# Altium PCB Inc_filter_v1.PcbDoc (part 3 of 4)
Units mil, origin at the board's own origin, x right, y up, seen from the top; angles counter-clockwise.
Board outline 13370 x 13370 mil, 2 copper layers (Top Layer, Bottom Layer); 602 components, 261 nets, 1625 pads, 355 vias.
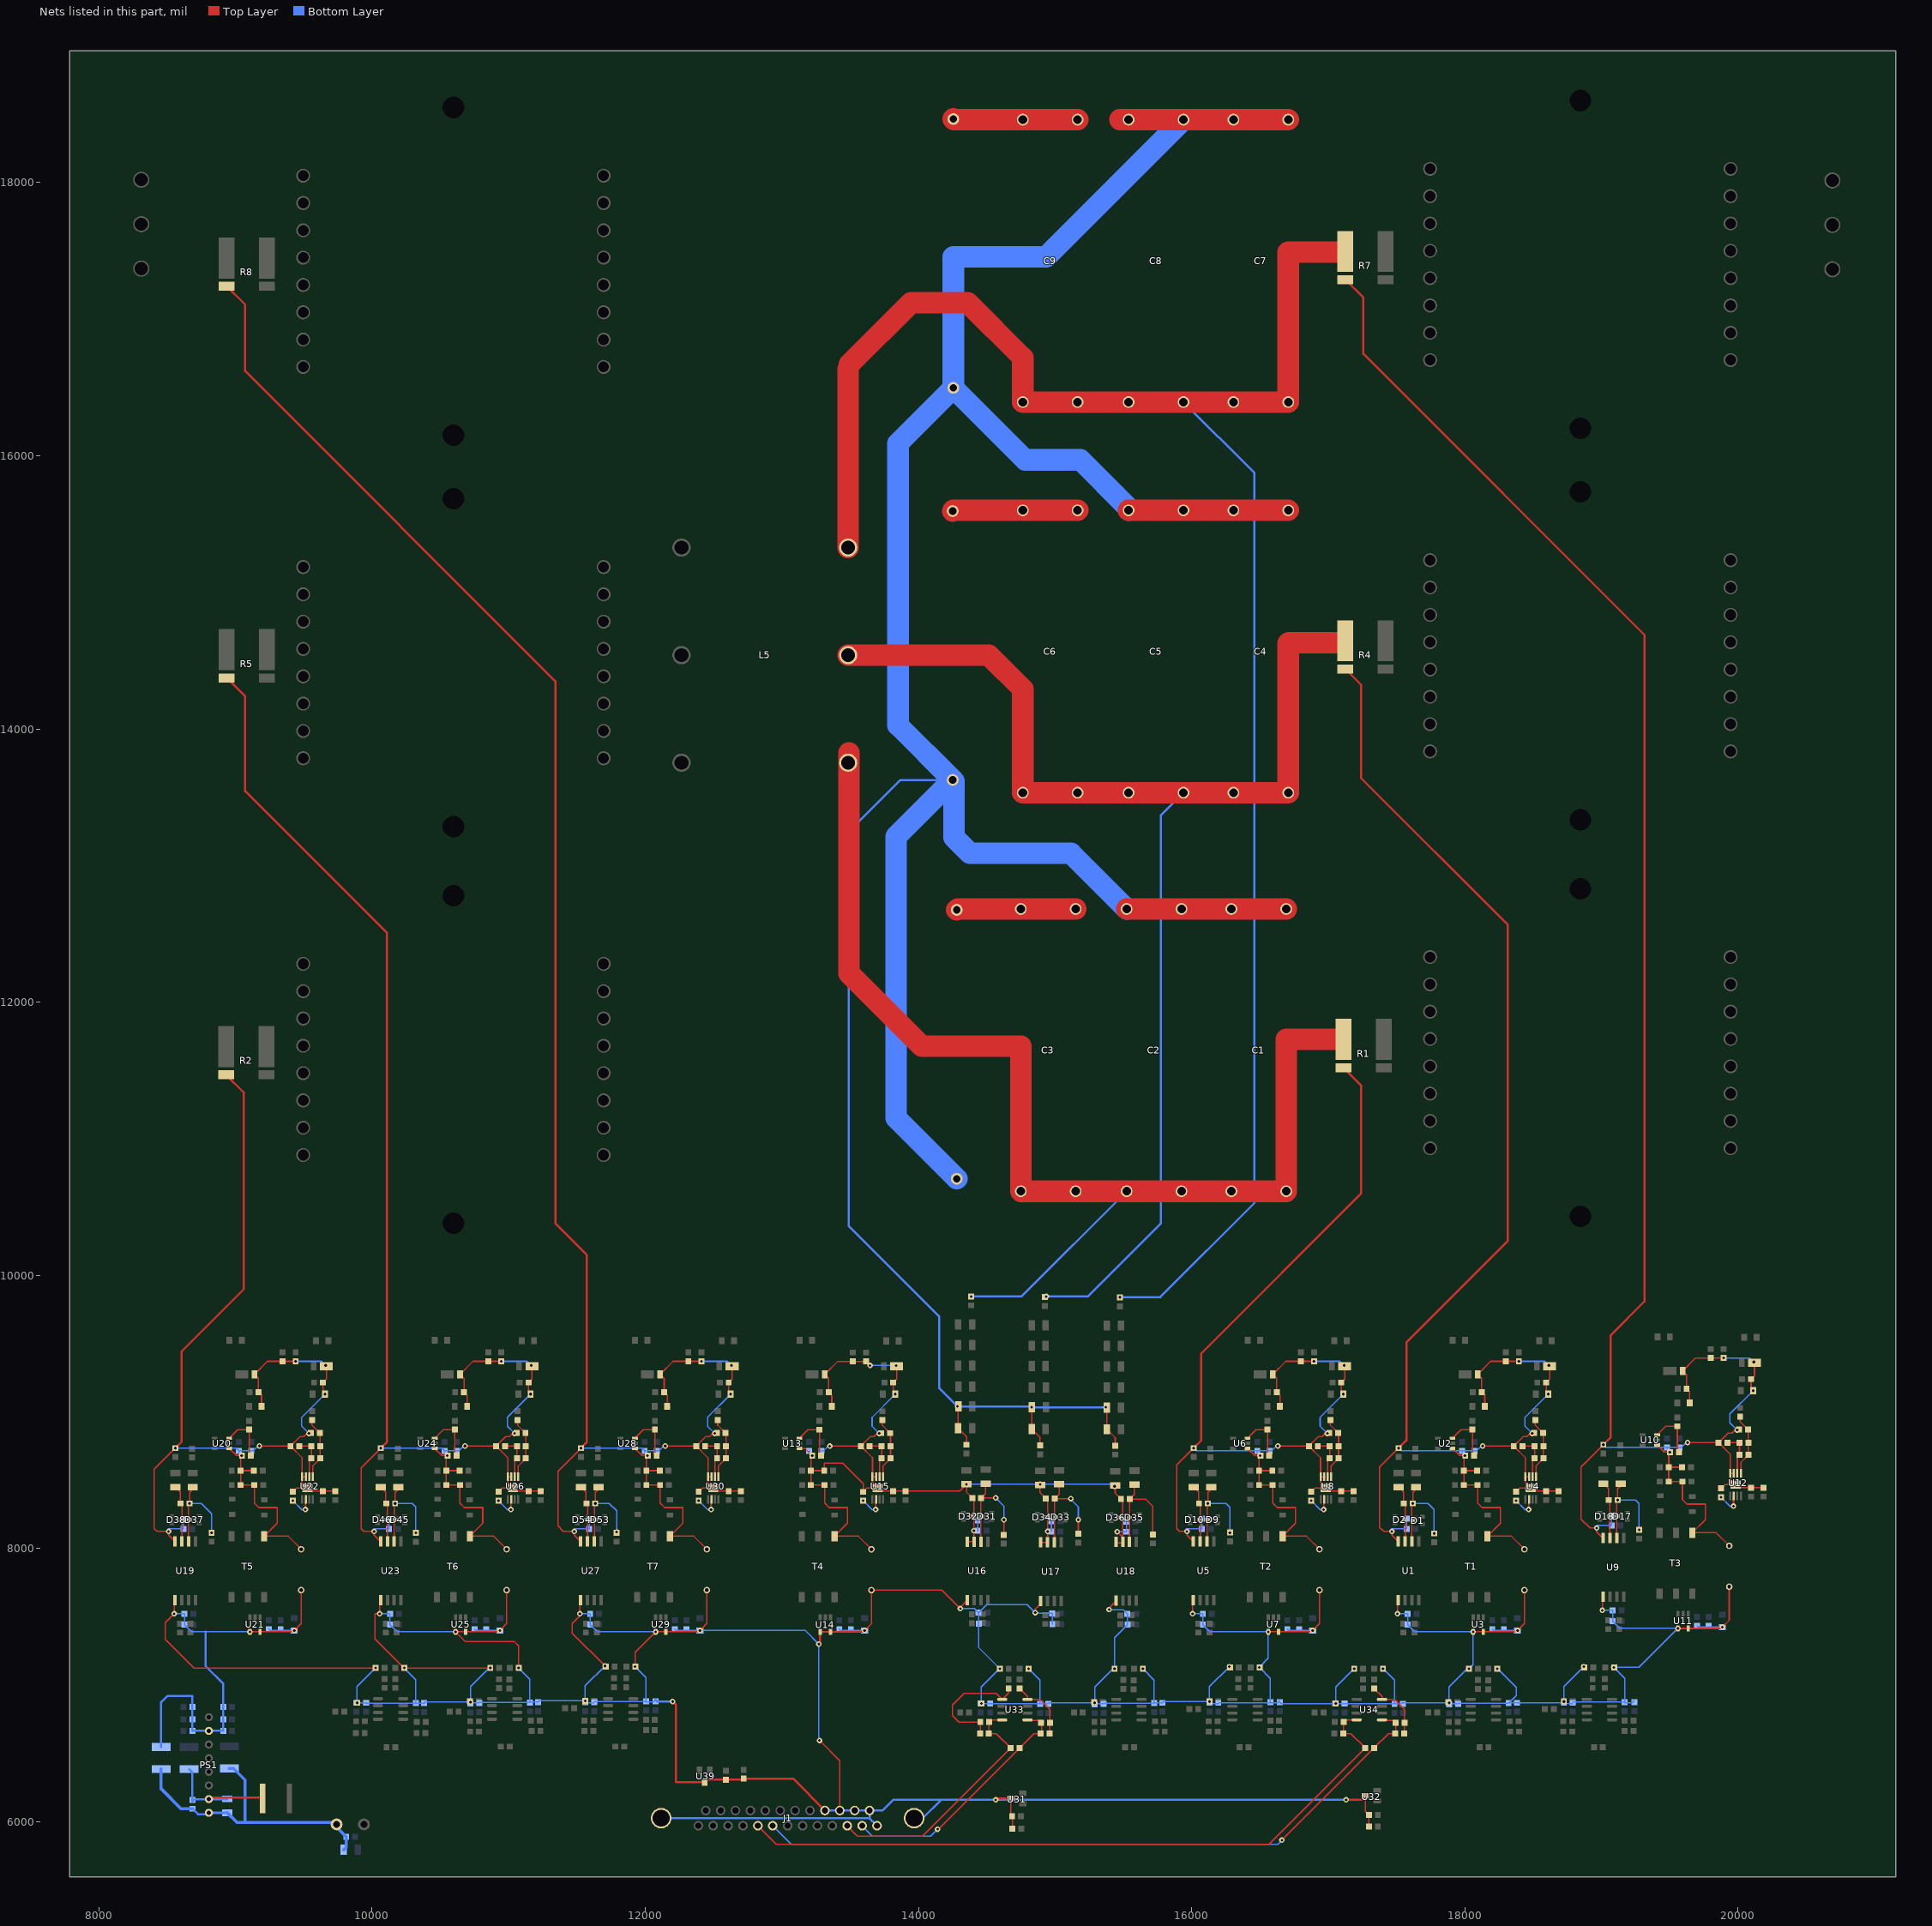
[diagram p3: the nets of this part, all layers, seen from the top]

## Via types
v1: diameter 40, hole 20, Top Layer to Bottom Layer, 355 vias

## Nets (pads, with @x,y where several pads share a name; then routed paths per layer and width w, separated by ;. In a path a pad name is that pad's centre, name@x,y a point inside that pad or via, vN(x,y) a via of type N, cw(c..) or ccw(c..) an arc to the next point about the centre after c; other vN are vias at no path point) (continued)
GND_LV: C11.2 C13.2 C15.1 C16.1 C17.1 C18.1 C36.2 C38.2 C40.1 C41.1 C42.1 C43.1 C61.2 C63.2 C65.1 C66.1 C67.1 C68.1 C85.1 C86.1 C87.1 C88.1 C106.2 C108.2 C111.2 C113.2 C116.2 C118.2 C121.2 C123.2 C125.1 C126.1 C127.1 C128.1 C146.2 C148.2 C150.1 C151.1 C152.1 C153.1 C171.2 C173.2 C175.1 C176.1 C177.1 C178.1 C197.2 C200.1 C201.1 C202.1 C203.2 C204.2 C205.2 C206.1 C207.1 C208.1 C209.1 C212.1 C213.1 C214.1 C215.1 C216.1 C217.1 C218.2 C219.2 C220.2 C221.2 C226.1 C227.1 C228.1 C229.1 C230.1 C231.1 C232.2 C233.2 C234.2 C235.2 C240.1 C241.1 C242.1 C243.1 C244.1 C245.1 C246.2 C247.2 C248.2 C249.2 C252.1 C253.1 C255.1 C256.1 C257.1 C258.2 C259.2 C262.1 C263.1 C264.1 C265.2 C266.2 C269.1 C270.1 C271.1 C272.2 C273.2 J1.13 J1.14 J1.15 J1.16 J1.17 J1.26 J1.27 PS1.7 R110.2 R111.2 R116.2 R118.2 R126.2 R127.2 R132.2 R134.2 R142.2 R143.2 R148.2 R150.2 R155.2 R158.2 R163.2 R166.2 R171.2 R174.2 U1.5 U3.4 U3.5 U5.5 U7.4 U7.5 U9.5 U11.4 U11.5 U14.4 U14.5 U16.5 U17.5 U18.5 U19.5 U21.4 U21.5 U23.5 U25.4 U25.5 U27.5 U29.4 U29.5 U31.3 U32.3 U39.3 | length 44028.6
  Top Layer w7.87: U19.5@8556.72,7621.96 8550.72,7615.96 v1(8550.72,7521.96) 8485,7456.24 8485,7335 8694.96,7125.04 v1(10025.04,7125.04) R158.2@10025.08,7125 ; U23.5@10061.72,7621.96 10055.72,7615.96 v1(10055.72,7521.96) 10021.96,7521.96 10021.96,7338.08 v1(10235.04,7125) v1(10865.08,7125) ; U27.5@11527,7621.96 11521,7615.96 v1(11521,7521.96) 11521,7506 11465,7450 11465,7380.04 v1(11705.04,7140) R174.2@11720.04,7140 ; v1(11925.04,7135) 11925.04,7239.57 v1(12075.47,7390) ; C85.1@13655,7694.72 14171.46,7694.72 v1(14306.18,7560) ; v1(14595,7120.04) v1(14595,7120.04) ; v1(16006,7521.96) 16006,7615.96 U5.5@16012,7621.96 ; v1(16275,7135) R148.2@16290,7135 ; v1(17190,7120.04) v1(17190,7120.04) ; v1(17506,7521.96) 17506,7615.96 U1.5@17512,7621.96 ; v1(18870,7135) R150.2@18885,7135 ; v1(19005.72,7546.96) 19005.72,7640.96 U9.5@19011.72,7646.96
  Top Layer w10: v1(9105.2,7390) U21.5@9180,7390 9420,7390 v1(9430,7400) 9480,7450 C125.1@9480,7695 9480,7700 C125.1@9475,7705 ; C150.1@10985,7695 10985,7450 v1(10935,7400) 10925,7390 U25.5@10685,7390 v1(10610.2,7390) 10680,7320.2 11039.8,7320.2 11072.52,7287.48 v1(11072.52,7125) ; v1(12075.47,7390) U29.5@12150.28,7390 12390.28,7390 v1(12400.28,7400) 12450.28,7450 C175.1@12450.28,7695 ; v1(13275,6595) 13423.58,6446.42 J1.16@13423.58,6081.81 ; U14.4@13280.2,7389.72 U14.5@13355,7389.72 13595,7389.72 v1(13605,7399.72) 13655,7449.72 C85.1@13655,7694.72 ; v1(14306.18,7560) 14306.18,7570.87 U16.5@14356.18,7620.87 ; U31.3@14676.69,6170 14676.69,6048.35 C206.1@14685.04,6040 14687.52,6037.52 C207.1@14687.52,5950 ; v1(14855,7530) 14855,7555.79 14894.96,7595.75 U17.5@14894.96,7615.83 ; v1(15395,7552.48) 15395,7563.35 U18.5@15445,7613.35 ; v1(16560.47,7390) U7.5@16635.28,7390 16875.28,7390 v1(16885.28,7400) 16935.28,7450 C40.1@16935.28,7695 ; U32.3@17271.69,6190 17271.69,6075.83 C208.1@17297.52,6050 C209.1@17297.52,5965 ; v1(18060,7390) U3.4@18060.47,7390 U3.5@18135.28,7390 18375.28,7390 v1(18385.28,7400) 18435.28,7450 C15.1@18435.28,7695 ; v1(19560.2,7415) U11.5@19635,7415 19875,7415 v1(19885,7425) 19935,7475 C65.1@19935,7720
  Top Layer w15.75: v1(12200,6880) 12225,6855 12225,6290 U39.3@12435,6290 12452.52,6307.52 C252.1@12590,6307.52 12712.48,6307.52 C253.1@12720,6315.04 13081.3,6315.04 J1.17@13314.53,6081.81 ; v1(13269.96,7299.96) 13280.2,7310.2 U14.4@13280.2,7389.72 ; v1(14565,6160) 14575,6170 U31.3@14676.69,6170 ; v1(17130,6160) 17241.69,6160 U32.3@17271.69,6190
  Bottom Layer w7.87: v1(8550.72,7521.96) C123.2@8626.24,7521.96 C121.2@8626.24,7441.96 8678.2,7390 8780,7390 v1(9105.2,7390) 9125.2,7390 ; v1(10025.04,7125.04) 9890.08,6990.08 v1(9890.08,6870) v1(9890.08,6870) C257.1@9955.04,6869.96 9957.52,6867.48 C258.2@10320.04,6867.48 ; v1(10055.72,7521.96) C148.2@10131.24,7521.96 C146.2@10131.24,7441.96 10183.2,7390 v1(10610.2,7390) 10630.2,7390 ; v1(10235.04,7125) 10320.04,7040 C258.2@10320.04,6867.48 ; v1(10865.08,7125) 10855.04,7125 10720.04,6990 v1(10720.04,6875.04) ; v1(11072.52,7125) 11155.04,7042.48 11155.04,6879.96 C265.2@11158.78,6876.22 ; C265.2@11155.04,6872.48 10782.56,6872.48 10780.04,6869.96 10725.12,6869.96 v1(10720.04,6875.04) ; C265.2@11160,6875 C266.2@11215.04,6874.96 11225.04,6885 v1(11560.08,6885) ; v1(11521,7521.96) C173.2@11596.52,7521.96 C171.2@11596.52,7441.96 11648.48,7390 v1(12075.47,7390) 12095.47,7390 ; C271.1@11625.04,6869.96 11575.12,6869.96 v1(11560.08,6885) ; C271.1@11625.04,6874.96 11630.04,6879.96 C273.2@12005.04,6879.96 ; v1(11705.04,7140) 11560.08,6995.04 v1(11560.08,6885) ; v1(11925.04,7135) 12005.04,7055 C273.2@12005.04,6879.96 ; C272.2@12075.04,6892.48 12057.56,6875 12005.04,6875 C273.2@12005.04,6879.96 ; C108.2@14438.7,7530 14498.7,7590 14795,7590 v1(14855,7530) ; v1(14595,7120.04) 14460.04,6985.08 v1(14460.04,6865) 14460.08,6864.96 C215.1@14525,6864.96 14527.48,6862.48 C218.2@14890,6862.48 ; v1(14805,7120) 14890,7035 C218.2@14890,6862.48 ; C229.1@15350,6864.96 15295.08,6864.96 v1(15290,6870.04) ; C229.1@15355,6862.48 15360,6867.48 C232.2@15725,6867.48 ; C116.2@15530.04,7442.48 15435.04,7347.48 v1(15435.04,7120) 15425,7120 15290,6985 v1(15290,6870.04) ; v1(15642.48,7120) 15725,7037.48 15725,6874.96 C232.2@15728.74,6871.22 ; C232.2@15729.96,6870 C233.2@15785,6869.96 ; C233.2@15785,6869.96 15795.04,6880 v1(16130.04,6880) ; v1(16006,7521.96) C38.2@16081.52,7521.96 C36.2@16081.52,7441.96 16133.48,7390 v1(16560.47,7390) 16560.47,7195.47 v1(16495,7130) 16575,7050 C247.2@16575,6874.96 C247.2@16575,6870 ; C243.1@16195,6864.96 16145.08,6864.96 v1(16130.04,6880) ; C243.1@16195,6869.96 16574.96,6869.96 C247.2@16575,6870 ; v1(16275,7135) 16130.04,6990.04 v1(16130.04,6880) ; C246.2@16645,6874.96 16654.96,6865 v1(17055.04,6865) ; C246.2@16645,6887.48 16627.52,6870 C247.2@16575,6870 ; v1(17190,7120.04) 17055.04,6985.08 v1(17055.04,6865) ; v1(17400,7120) 17485,7035 C220.2@17485,6862.48 ; v1(17506,7521.96) C13.2@17581.52,7521.96 C11.2@17581.52,7441.96 17633.48,7390 v1(18060,7390) 18060,7150.91 18060.47,7150.43 v1(18030.04,7120) 18020,7120 17885,6985 v1(17885,6870.04) ; C231.1@17945,6864.96 17890.08,6864.96 v1(17885,6870.04) ; C231.1@17950,6862.48 17955,6867.48 C234.2@18320,6867.48 ; v1(18237.48,7120) 18375,6982.48 18375,6922.48 C234.2@18323.74,6871.22 ; C234.2@18324.96,6870 C235.2@18380,6869.96 ; C235.2@18380,6869.96 18715,6869.96 v1(18725.04,6880) 18725.04,6990.04 v1(18870,7135) ; C244.1@18740.08,6864.96 C245.1@18790,6864.96 ; C245.1@18790,6869.96 18795,6874.96 C249.2@19170,6874.96 ; v1(19005.72,7546.96) C63.2@19081.24,7546.96 C61.2@19081.24,7466.96 19133.2,7415 v1(19560.2,7415) 19275.2,7130 v1(19090,7130) 19170,7050 C249.2@19170,6874.96 ; C248.2@19240,6887.48 19222.52,6870 19170,6870 C249.2@19170,6874.96 ; C258.2@10320.04,6867.48 C259.2@10380.04,6867.48 10387.6,6875.04 v1(10720.04,6875.04) ; C218.2@14890,6862.48 C219.2@14950,6862.48 14957.56,6870.04 v1(15290,6870.04) ; v1(17055.04,6865) 17055.08,6864.96 C217.1@17120,6864.96 17122.48,6862.48 C220.2@17485,6862.48 ; C220.2@17485,6862.48 17535,6862.48 17542.56,6870.04 v1(17885,6870.04)
  Bottom Layer w10: C128.1@9245,7410 9255,7400 v1(9430,7400) ; C153.1@10750,7410 10760,7400 v1(10935,7400) ; C178.1@12215.28,7410 12225.28,7400 v1(12400.28,7400) 13169.92,7400 v1(13269.96,7299.96) 13269.96,6600.04 v1(13275,6595) ; C88.1@13420,7409.72 13430,7399.72 v1(13605,7399.72) ; v1(14306.18,7560) 14408.7,7560 C108.2@14438.7,7530 14441.22,7527.48 C106.2@14441.22,7450 14441.22,7273.82 v1(14595,7120.04) ; v1(14855,7530) 14855,7525 14854.96,7524.96 C113.2@14977.48,7524.96 14980,7522.44 C111.2@14980,7444.96 ; v1(15395,7552.48) 15497.52,7552.48 C118.2@15527.52,7522.48 15530.04,7519.96 C116.2@15530.04,7442.48 ; C43.1@16700.28,7410 16710.28,7400 v1(16885.28,7400) ; C18.1@18200.28,7410 18210.28,7400 v1(18385.28,7400) ; C68.1@19700,7435 19710,7425 v1(19885,7425)
  Bottom Layer w15.75: C197.2@8455,6546.42 8455,6875 8500.04,6920.04 8684.96,6920.04 C200.1@8684.96,6840 C202.1@8684.96,6750 C201.1@8684.96,6665 PS1.7@8805,6665 C203.2@8910,6665 C205.2@8910,6750 C204.2@8910,6840 8910,7010 8780,7140 8780,7390 ; C272.2@12075.04,6892.48 12087.52,6880 v1(12200,6880) ; J1.26@12115.91,6025.91 12117.28,6024.53 13641.69,6024.53 ; J1.17@13309.53,6086.81 J1.17@13314.53,6081.81 J1.16@13423.58,6081.81 J1.15@13532.64,6081.81 J1.14@13641.69,6081.81 ; J1.13@13696.22,5970 13641.69,6024.53 ; J1.27@13967.87,6025.91 14030.91,6025.91 14165,6160 ; v1(17130,6160) v1(14565,6160) 14165,6160 ; 13641.69,6024.53 J1.14@13641.69,6081.81 ; J1.14@13641.69,6081.81 13736.81,6081.81 13815,6160 14165,6160
GND_PH: C85.2 C89.1 C90.1 C91.1 C92.1 C93.1 C94.2 C95.2 C96.1 C97.1 C98.1 C99.1 C101.1 C102.1 C103.1 C104.1 C105.1 C107.1 C109.2 C110.1 C112.1 C114.2 C115.1 C117.1 C119.2 D27.2 D30.1 D32.C D34.C D36.C R37.1 R39.1 R40.1 R52.2 R64.2 R76.2 T4.4 U13.1 U15.3 U15.4 U15.9 U16.3 U16.4 U17.3 U17.4 U18.3 U18.4 | length 8006.5
  Top Layer w7.87: C95.2@13310.04,8569.72 13310.04,8624.96 13445.04,8624.96 13595,8475 C104.1@13595,8414.68 ; C99.1@13905,8419.72 14300.91,8419.72 v1(14351.18,8470) ; U16.4@14356.18,8050 U16.3@14406.18,8050 ; U17.4@14894.96,8044.96 U17.3@14944.96,8044.96 ; U18.4@15445,8042.48 U18.3@15495,8042.48
  Top Layer w10: U13.1@13128.15,8732.32 13169.92,8732.32 v1(13222.52,8679.72) 13212.48,8669.68 C90.1@13212.48,8569.72 ; C95.2@13310.04,8569.72 C90.1@13212.48,8569.72 ; v1(13350,8749.72) R40.1@13577.52,8749.72 ; C93.1@13365.28,9039.72 13365.28,9121.93 C92.1@13342.48,9144.72 13342.48,9245.75 D27.2@13313.5,9274.72 13408.5,9369.72 R37.1@13520,9369.72 13520.04,9369.76 R39.1@13615,9369.76 v1(13645.04,9339.72) ; C104.1@13595,8414.68 13622.72,8442.4 U15.9@13701.61,8442.4 ; C85.2@13655,7994.72 13559.72,8090 T4.4@13385.08,8090 13480,8184.92 13480,8299.72 13345,8299.72 13312.52,8332.2 C94.2@13312.52,8464.72 C89.1@13212.48,8464.72 C90.1@13212.48,8569.72 ; U15.3@13691.54,8522.36 U15.3@13688.82,8525.08 U15.4@13663.23,8525.08 ; C103.1@13727.52,8844.72 13725,8842.2 v1(13712.52,8842.2) 13705,8849.72 13675,8819.72 13647.52,8819.72 R40.1@13577.52,8749.72 ; C102.1@13820,9119.72 v1(13830,9129.72) 13815,9144.72 C101.1@13815,9214.72 13840,9239.72 D30.1@13840,9334.72 v1(13835,9339.72) ; C99.1@13905,8419.72 13724.29,8419.72 U15.9@13701.61,8442.4 ; v1(14351.18,8470) 14351.18,8412.52 C109.2@14393.7,8370 14406.18,8357.52 v1(14406.18,8130) U16.3@14406.18,8050 ; R64.2@14889.96,8464.96 14889.96,8407.48 C114.2@14932.48,8364.96 14944.96,8352.48 v1(14944.96,8125) U17.3@14944.96,8044.96 ; R76.2@15440,8455 15440,8405 C119.2@15482.52,8362.48 15495,8350 U18.3@15495,8082.48 ; v1(15455,8122.48) U18.3@15495,8082.48 ; U18.3@15495,8042.48 U18.3@15495,8049.13 U18.3@15495,8082.48 ; R40.1@13577.52,8749.72 13663.23,8664.02 U15.4@13663.23,8525.08 ; U15.4@13663.23,8525.08 13663.23,8480.79 U15.9@13701.61,8442.4
  Bottom Layer w7.87: v1(14351.18,8470) v1(14890,8470) v1@15435,8470
  Bottom Layer w10: C96.1@13200,8714.76 13200,8702.24 v1(13222.52,8679.72) ; C97.1@13290,8714.76 13305.04,8714.76 13340,8749.72 v1(13350,8749.72) ; v1(13645.04,9339.72) v1(13835,9339.72) ; v1(13712.52,8842.2) 13660,8894.72 13660,8959.72 v1(13830,9129.72) ; v1(14406.18,8130) C105.1@14433.7,8130 C107.1@14433.7,8205 ; v1(14944.96,8125) 14972.44,8125 C110.1@14972.48,8124.96 C112.1@14972.48,8199.96 ; v1(15455,8122.48) C115.1@15522.52,8122.48 C117.1@15522.52,8197.48
  other v1: 15435,8455
GND_PWR: C196.1 C197.1 C198.1 C199.1 C275.2 C276.2 P1.2 PS1.1 | length 2221.2
  Bottom Layer w15.75: C199.1@8685,6095.04 8725,6055.04 8795.04,6055.04 PS1.1@8805,6065 C198.1@8940,6065
  Bottom Layer w23.62: C197.1@8455,6385 8455,6240 8599.96,6095.04 C199.1@8685,6095.04 ; C198.1@8940,6065 9010,5995 9070,5995 ; C196.1@8955,6390 8985,6390 9070,6305 9070,5995 ; P1.2@9740,5980 9740,5960.04 C276.2@9810.04,5890 9810.04,5812.4 C275.2@9792.64,5795 ; P1.2@9740,5995 9070,5995
GND_USH1: C35.1 C37.1 C40.2 C44.1 C45.1 C46.1 C47.1 C48.1 C49.2 C50.2 C51.1 C52.1 C53.1 C54.1 C56.1 C57.1 C58.1 C59.1 D13.2 D16.1 FB6.1 R1.2 R24.1 R26.1 R27.1 T2.4 U5.4 U6.1 U8.3 U8.4 U8.9 | length 9048
  Top Layer w7.87: U5.4@16012,8051.09 15965,8098.09 v1(15965,8125) 15910,8125 15890,8145 15890,8610.92 v1(16014,8734.92) ; U6.1@16408.43,8732.6 16461.02,8680 v1(16500,8680)
  Top Layer w10: v1(16500,8680) 16500,8677.2 16492.76,8669.96 C45.1@16492.76,8570 ; C50.2@16590.31,8570 C45.1@16492.76,8570 ; v1(16630.28,8750) R27.1@16857.8,8750 ; C48.1@16645.55,9040 16645.55,9122.2 C47.1@16622.76,9145 16622.76,9246.02 D13.2@16593.78,9275 16688.78,9370 R24.1@16800.28,9370 R24.1@16800.28,9370 R26.1@16895.28,9370.04 16895.24,9370 v1(16895,9370) ; C59.1@16875.28,8414.96 16902.99,8442.68 U8.9@16981.89,8442.68 ; C40.2@16935.28,7995 16840,8090.28 T2.4@16665.35,8090.28 16760.28,8185.2 16760.28,8300 16625.28,8300 16592.8,8332.48 C49.2@16592.8,8465 C44.1@16492.76,8465 C45.1@16492.76,8570 ; U8.3@16971.81,8522.64 U8.3@16969.09,8525.35 U8.4@16943.5,8525.35 ; C58.1@17007.8,8845 17005.28,8842.48 v1(16992.8,8842.48) 16985.28,8850 16955.28,8820 16927.8,8820 R27.1@16857.8,8750 ; C57.1@17100.28,9120 v1(17110.28,9130) 17095.28,9145 C56.1@17095.28,9215 17120.28,9240 D16.1@17120.28,9335 v1(17115.28,9340) ; C54.1@17185.28,8420 17004.57,8420 U8.9@16981.89,8442.68 ; R27.1@16857.8,8750 16943.5,8664.29 U8.4@16943.5,8525.35 ; U8.4@16943.5,8525.35 16943.5,8481.06 U8.9@16981.89,8442.68
  Top Layer w15.75: v1(16014,8734.92) 16070,8790.92 16070,9428.41 17241.25,10599.66 17241.25,11389.65 R1.2@17110.91,11520
  Bottom Layer w7.87: v1(15965,8125) 15965,8140.96 15970,8145.96 16070,8145.96 C37.1@16074,8141.96 C35.1@16074,8217.96 ; v1(16014,8734.92) 16033.88,8715.04 C51.1@16480.28,8715.04 C52.1@16570.28,8715.04
  Bottom Layer w10: C51.1@16480.28,8715.04 16480.28,8702.52 16500,8682.8 v1(16500,8680) ; C52.1@16570.28,8715.04 16585.31,8715.04 16620.28,8750 v1(16630.28,8750) ; v1(16895,9370) 17085.28,9370 v1(17115.28,9340) ; v1(16992.8,8842.48) 16940.28,8895 16940.28,8960 v1(17110.28,9130)
GND_USH2: C120.1 C122.1 C125.2 C129.1 C130.1 C131.1 C132.1 C133.1 C134.2 C135.2 C136.1 C137.1 C138.1 C139.1 C141.1 C142.1 C143.1 C144.1 D41.2 D44.1 FB19.1 R2.2 R82.1 R84.1 R85.1 T5.4 U19.4 U20.1 U22.3 U22.4 U22.9 | length 8736.7
  Top Layer w7.87: U19.4@8556.72,8051.09 8509.72,8098.09 v1(8509.72,8125) 8425,8125 8405,8145 8405,8581.2 v1(8558.72,8734.92) ; U20.1@8953.15,8732.6 9005.75,8680 v1(9044.72,8680)
  Top Layer w10: v1(9044.72,8680) 9044.72,8677.2 9037.48,8669.96 C130.1@9037.48,8570 ; C135.2@9135.04,8570 C130.1@9037.48,8570 ; v1(9175,8750) R85.1@9402.52,8750 ; C133.1@9190.28,9040 9190.28,9122.2 C132.1@9167.48,9145 9167.48,9246.02 D41.2@9138.5,9275 9233.5,9370 R82.1@9345,9370 R82.1@9345,9370 R84.1@9440,9370.04 R84.1@9440,9370.04 v1(9439.72,9370) ; C144.1@9420,8414.96 9447.72,8442.68 U22.9@9526.61,8442.68 ; C125.2@9480,7995 9384.72,8090.28 T5.4@9210.08,8090.28 9305,8185.2 9305,8300 9170,8300 9137.52,8332.48 C134.2@9137.52,8465 C129.1@9037.48,8465 C130.1@9037.48,8570 ; U22.3@9516.54,8522.64 U22.3@9513.82,8525.35 U22.4@9488.23,8525.35 ; C143.1@9552.52,8845 9550,8842.48 v1(9537.52,8842.48) 9530,8850 9500,8820 9472.52,8820 R85.1@9402.52,8750 ; C142.1@9645,9120 v1(9655,9130) 9640,9145 C141.1@9640,9215 9665,9240 D44.1@9665,9335 v1(9660,9340) ; C139.1@9730,8420 9549.29,8420 U22.9@9526.61,8442.68 ; R85.1@9402.52,8750 9488.23,8664.29 U22.4@9488.23,8525.35 ; U22.4@9488.23,8525.35 9488.23,8481.06 U22.9@9526.61,8442.68
  Top Layer w15.75: v1(8558.72,8734.92) 8604.87,8781.07 8604.87,9443.46 9060,9898.58 9060,11338.82 R2.2@8930.91,11467.91
  Bottom Layer w7.87: v1(8509.72,8125) 8509.72,8140.96 8514.72,8145.96 8614.72,8145.96 C122.1@8618.72,8141.96 C120.1@8618.72,8217.96 ; v1(8558.72,8734.92) 9004.84,8734.92 9024.72,8715.04 C136.1@9025,8715.04 C137.1@9115,8715.04
  Bottom Layer w10: C136.1@9025,8715.04 9025,8702.52 9044.72,8682.8 v1(9044.72,8680) ; C137.1@9115,8715.04 9130.04,8715.04 9165,8750 v1(9175,8750) ; v1(9439.72,9370) 9630,9370 v1(9660,9340) ; v1(9537.52,8842.48) 9485,8895 9485,8960 v1(9655,9130)
GND_VSH1: C10.1 C12.1 C15.2 C19.1 C20.1 C21.1 C22.1 C23.1 C24.2 C25.2 C26.1 C27.1 C28.1 C29.1 C31.1 C32.1 C33.1 C34.1 D5.2 D8.1 FB2.1 R4.2 R15.1 R17.1 R18.1 T1.4 U1.4 U2.1 U4.3 U4.4 U4.9 | length 12243.6
  Top Layer w7.87: U1.4@17512,8051.09 17465,8098.09 v1(17465,8125) 17405,8125 17375,8155 17375,8595.92 v1(17514,8734.92) ; U2.1@17908.43,8732.6 17961.02,8680 v1(18000,8680)
  Top Layer w10: v1(18000,8680) 18000,8677.2 17992.76,8669.96 C20.1@17992.76,8570 ; C25.2@18090.31,8570 C20.1@17992.76,8570 ; v1(18130.28,8750) R18.1@18357.8,8750 ; C23.1@18145.55,9040 18145.55,9122.2 C22.1@18122.76,9145 18122.76,9246.02 D5.2@18093.78,9275 18188.78,9370 R15.1@18300.28,9370 R15.1@18300.28,9370 R17.1@18395.28,9370.04 18395.24,9370 v1(18395,9370) ; C34.1@18375.28,8414.96 18402.99,8442.68 U4.9@18481.89,8442.68 ; C15.2@18435.28,7995 18340,8090.28 T1.4@18165.35,8090.28 18260.28,8185.2 18260.28,8300 18125.28,8300 18092.8,8332.48 C24.2@18092.8,8465 C19.1@17992.76,8465 C20.1@17992.76,8570 ; U4.3@18471.81,8522.64 U4.3@18469.09,8525.35 U4.4@18443.5,8525.35 ; C33.1@18507.8,8845 18505.28,8842.48 v1(18492.8,8842.48) 18485.28,8850 18455.28,8820 18427.8,8820 R18.1@18357.8,8750 ; C32.1@18600.28,9120 v1(18610.28,9130) 18595.28,9145 C31.1@18595.28,9215 18620.28,9240 D8.1@18620.28,9335 v1(18615.28,9340) ; C29.1@18685.28,8420 18504.57,8420 U4.9@18481.89,8442.68 ; R18.1@18357.8,8750 18443.5,8664.29 U4.4@18443.5,8525.35 ; U4.4@18443.5,8525.35 18443.5,8481.06 U4.9@18481.89,8442.68
  Top Layer w15.75: R4.2@17125,14437.91 17240,14322.91 17240,13640 18315,12565 18315,10253.41 17571.25,9509.66 17571.25,8792.17 v1(17514,8734.92)
  Bottom Layer w7.87: v1(17465,8125) 17465,8140.96 17470,8145.96 17570,8145.96 C12.1@17574,8141.96 C10.1@17574,8217.96 ; v1(17514,8734.92) 17533.88,8715.04 C26.1@17980.28,8715.04 C27.1@18070.28,8715.04
  Bottom Layer w10: C26.1@17980.28,8715.04 17980.28,8702.52 18000,8682.8 v1(18000,8680) ; C27.1@18070.28,8715.04 18085.31,8715.04 18120.28,8750 v1(18130.28,8750) ; v1(18395,9370) 18585.28,9370 v1(18615.28,9340) ; v1(18492.8,8842.48) 18440.28,8895 18440.28,8960 v1(18610.28,9130)
GND_VSH2: C145.1 C147.1 C150.2 C154.1 C155.1 C156.1 C157.1 C158.1 C159.2 C160.2 C161.1 C162.1 C163.1 C164.1 C166.1 C167.1 C168.1 C169.1 D49.2 D52.1 FB23.1 R5.2 R91.1 R93.1 R94.1 T6.4 U23.4 U24.1 U26.3 U26.4 U26.9 | length 11868.1
  Top Layer w7.87: U23.4@10061.72,8051.09 10014.72,8098.09 v1(10014.72,8125) 9940,8125 9920,8145 9920,8591.2 v1(10063.72,8734.92) ; U24.1@10458.15,8732.6 10510.75,8680 v1(10549.72,8680)
  Top Layer w10: v1(10549.72,8680) 10549.72,8677.2 10542.48,8669.96 C155.1@10542.48,8570 ; C160.2@10640.04,8570 C155.1@10542.48,8570 ; v1(10680,8750) R94.1@10907.52,8750 ; C158.1@10695.28,9040 10695.28,9122.2 C157.1@10672.48,9145 10672.48,9246.02 D49.2@10643.5,9275 10738.5,9370 R91.1@10850,9370 R91.1@10850,9370 R93.1@10945,9370.04 R93.1@10945,9370.04 v1(10944.72,9370) ; C169.1@10925,8414.96 10952.72,8442.68 U26.9@11031.61,8442.68 ; C150.2@10985,7995 10889.72,8090.28 T6.4@10715.08,8090.28 10810,8185.2 10810,8300 10675,8300 10642.52,8332.48 C159.2@10642.52,8465 C154.1@10542.48,8465 C155.1@10542.48,8570 ; U26.3@11021.54,8522.64 U26.3@11018.82,8525.35 U26.4@10993.23,8525.35 ; C168.1@11057.52,8845 11055,8842.48 v1(11042.52,8842.48) 11035,8850 11005,8820 10977.52,8820 R94.1@10907.52,8750 ; C167.1@11150,9120 v1(11160,9130) 11145,9145 C166.1@11145,9215 11170,9240 D52.1@11170,9335 v1(11165,9340) ; C164.1@11235,8420 11054.29,8420 U26.9@11031.61,8442.68 ; R94.1@10907.52,8750 10993.23,8664.29 U26.4@10993.23,8525.35 ; U26.4@10993.23,8525.35 10993.23,8481.06 U26.9@11031.61,8442.68
  Top Layer w15.75: R5.2@8935.91,14372.91 9070,14238.82 9070,13544.82 10109.87,12504.95 10109.87,8785.02 ; v1(10063.72,8734.92) 10110,8781.2
  Bottom Layer w7.87: v1(10014.72,8125) 10014.72,8140.96 10019.72,8145.96 10119.72,8145.96 C147.1@10123.72,8141.96 C145.1@10123.72,8217.96 ; v1(10063.72,8734.92) 10509.84,8734.92 10529.72,8715.04 C161.1@10530,8715.04 C162.1@10620,8715.04
  Bottom Layer w10: C161.1@10530,8715.04 10530,8702.52 10549.72,8682.8 v1(10549.72,8680) ; C162.1@10620,8715.04 10635.04,8715.04 10670,8750 v1(10680,8750) ; v1(10944.72,9370) 11135,9370 v1(11165,9340) ; v1(11042.52,8842.48) 10990,8895 10990,8960 v1(11160,9130)
GND_WSH1: C60.1 C62.1 C65.2 C69.1 C70.1 C71.1 C72.1 C73.1 C74.2 C75.2 C76.1 C77.1 C78.1 C79.1 C81.1 C82.1 C83.1 C84.1 D21.2 D24.1 FB10.1 R7.2 R33.1 R35.1 R36.1 T3.4 U9.4 U10.1 U12.3 U12.4 U12.9 | length 15234.4
  Top Layer w7.87: U9.4@19011.72,8076.09 18964.72,8123.09 v1(18964.72,8150) 18915,8150 18850,8215 18850,8596.2 v1(19013.72,8759.92) ; U10.1@19408.15,8757.6 19460.75,8705 v1(19499.72,8705)
  Top Layer w10: C71.1@19492.48,8694.96 C70.1@19492.48,8595 ; C75.2@19590.04,8595 C70.1@19492.48,8595 ; v1(19630,8775) R36.1@19857.52,8775 ; C73.1@19645.28,9065 19645.28,9147.2 C72.1@19622.48,9170 19622.48,9271.02 D21.2@19593.5,9300 19688.5,9395 R33.1@19800,9395 R33.1@19800,9395 R35.1@19895,9395.04 R35.1@19895,9395.04 v1(19894.72,9395) ; C84.1@19875,8439.96 19902.72,8467.68 U12.9@19981.61,8467.68 ; C65.2@19935,8020 19839.72,8115.28 T3.4@19665.08,8115.28 19760,8210.2 19760,8325 19625,8325 19592.52,8357.48 C74.2@19592.52,8490 C69.1@19492.48,8490 C70.1@19492.48,8595 ; U12.3@19968.82,8550.35 U12.4@19943.23,8550.35 ; v1(19992.52,8867.48) 19985,8875 19955,8845 19927.52,8845 R36.1@19857.52,8775 ; C82.1@20100,9145 v1(20110,9155) 20095,9170 C81.1@20095,9240 20120,9265 D24.1@20120,9360 v1(20115,9365) ; C79.1@20185,8445 20004.29,8445 U12.9@19981.61,8467.68 ; R36.1@19857.52,8775 19943.23,8689.29 U12.4@19943.23,8550.35 ; U12.4@19943.23,8550.35 19943.23,8506.06 U12.9@19981.61,8467.68
  Top Layer w15.75: R7.2@17125,17287.91 17256.25,17156.66 17256.25,16745.91 19315,14687.16 19315,9808.58 19066.25,9559.84 19066.25,8812.45 v1(19013.72,8759.92)
  Bottom Layer w7.87: 18969.72,8170.96 19069.72,8170.96 C62.1@19073.72,8166.96 C60.1@19073.72,8242.96 ; v1(19013.72,8759.92) 19033.61,8740.04 C76.1@19480,8740.04 C77.1@19570,8740.04
  Bottom Layer w10: C76.1@19480,8740.04 19480,8727.52 19499.72,8707.8 v1(19499.72,8705) ; C77.1@19570,8740.04 19585.04,8740.04 19620,8775 v1(19630,8775) ; v1(19894.72,9395) 20085,9395 v1(20115,9365) ; v1(19992.52,8867.48) 19940,8920 19940,8985 v1(20110,9155)
GND_WSH2: C170.1 C172.1 C175.2 C179.1 C180.1 C181.1 C182.1 C183.1 C184.2 C185.2 C186.1 C187.1 C188.1 C189.1 C191.1 C192.1 C193.1 C194.1 D57.2 D60.1 FB27.1 R8.2 R100.1 R102.1 R103.1 T7.4 U27.4 U28.1 U30.3 U30.4 U30.9 | length 15365.6
  Top Layer w7.87: U27.4@11527,8051.09 11480,8098.09 v1(11480,8125) 11400,8125 11360,8165 11360,8565.92 v1(11529,8734.92) ; U28.1@11923.43,8732.6 11976.02,8680 v1(12015,8680)
  Top Layer w10: v1(12015,8680) 12015,8677.2 12007.76,8669.96 C180.1@12007.76,8570 ; C185.2@12105.32,8570 C180.1@12007.76,8570 ; v1(12145.28,8750) R103.1@12372.8,8750 ; C183.1@12160.55,9040 12160.55,9122.2 C182.1@12137.76,9145 12137.76,9246.02 D57.2@12108.78,9275 12203.78,9370 R100.1@12315.28,9370 R100.1@12315.28,9370 R102.1@12410.28,9370.04 12410.24,9370 v1(12410,9370) ; C194.1@12390.28,8414.96 12417.99,8442.68 U30.9@12496.89,8442.68 ; C175.2@12450.28,7995 12355,8090.28 T7.4@12180.35,8090.28 12275.28,8185.2 12275.28,8300 12140.28,8300 12107.8,8332.48 C184.2@12107.8,8465 C179.1@12007.76,8465 C180.1@12007.76,8570 ; U30.3@12486.81,8522.64 U30.3@12484.09,8525.35 U30.4@12458.5,8525.35 ; C193.1@12522.8,8845 12520.28,8842.48 v1(12507.8,8842.48) 12500.28,8850 12470.28,8820 12442.8,8820 R103.1@12372.8,8750 ; C192.1@12615.28,9120 v1(12625.28,9130) 12610.28,9145 C191.1@12610.28,9215 12635.28,9240 D60.1@12635.28,9335 v1(12630.28,9340) ; C189.1@12700.28,8420 12519.57,8420 U30.9@12496.89,8442.68 ; R103.1@12372.8,8750 12458.5,8664.29 U30.4@12458.5,8525.35 ; U30.4@12458.5,8525.35 12458.5,8481.06 U30.9@12496.89,8442.68
  Top Layer w15.75: R8.2@8935.91,17240 9070,17105.91 9070,16620 11341.25,14348.75 11341.25,10379.77 11570,10151.03 11570,8775.92 v1(11529,8734.92)
  Bottom Layer w7.87: v1(11480,8125) 11480,8140.96 11485,8145.96 11585,8145.96 C172.1@11589,8141.96 C170.1@11589,8217.96 ; v1(11529,8734.92) 11975.12,8734.92 11995,8715.04 C186.1@11995.28,8715.04 C187.1@12085.28,8715.04
  Bottom Layer w10: C186.1@11995.28,8715.04 11995.28,8702.52 12015,8682.8 v1(12015,8680) ; C187.1@12085.28,8715.04 12100.32,8715.04 12135.28,8750 v1(12145.28,8750) ; v1(12410,9370) 12600.28,9370 v1(12630.28,9340) ; v1(12507.8,8842.48) 12455.28,8895 12455.28,8960 v1(12625.28,9130)
N_HV: C1.1 C1.2 C2.1 C2.2 C4.1 C4.2 C5.1 C5.2 C7.1 C7.2 C8.1 C8.2 R3.1 R6.1 R9.1 R46.1 R47.1 R51.2 R58.1 R59.1 R63.2 R70.1 R71.1 R75.2 | length 24143
  Top Layer w7.87: R46.1@14285,9035 v1(14285,9040) ; v1(14828.78,9033.78) R58.1@14829.96,9034.96 ; v1(15371.22,9033.78) R70.1@15380,9025
  Top Layer w10: R46.1@14290,9035 R47.1@14290,8880 14351.18,8818.82 R51.2@14351.18,8760 ; v1(14828.78,9033.78) R59.1@14828.78,8874.96 14889.96,8813.78 R63.2@14889.96,8754.96 ; R70.1@15378.82,9025 R71.1@15378.82,8872.48 15440,8811.3 R75.2@15440,8752.48
  Top Layer w157.48: 15475,18460 C8.2@15538.43,18460 C8.1@15940,18460 C7.2@16305,18460 C7.1@16706.57,18460 ; C2.2@15523.43,12681.93 C2.1@15925,12681.93 C1.2@16290,12681.93 C1.1@16691.57,12681.93 ; C5.2@15538.43,15600 C5.1@15940,15600 C4.2@16305,15600 C4.1@16706.57,15600
  Bottom Layer w15.75: R6.1@14250,13626.5 13866.5,13626.5 13490,13250 13490,10360 14150,9700 14150,9175 v1(14285,9040) 14822.56,9040 v1(14828.78,9033.78) v1(15371.22,9033.78)
  Bottom Layer w157.48: R3.1@14280,10706.5 13835,11151.5 13835,13211.5 R6.1@14250,13626.5 ; C2.2@15523.43,12681.93 15115.35,13090 14375,13090 14260,13205 14260,13616.5 R6.1@14250,13626.5 ; C5.2@15538.43,15600 15538.43,15616.57 15185,15970 14781.5,15970 R9.1@14255,16496.5 ; C8.1@15940,18460 14935,17455 14255,17455 R9.1@14255,16496.5 ; R6.1@14250,13626.5 13850,14026.5 13850,16091.5 R9.1@14255,16496.5
NetC1_3: C1.3 C1.4 C2.3 C2.4 C3.3 C3.4 FB15.1 L5.1 R1.1 | length 9042
  Top Layer w15.75: FB15.1@14385,9845 v1(14386.18,9845)
  Top Layer w157.48: 13490,13825 13490,12210 14023.43,11676.57 14748.43,11676.57 C3.3@14748.43,10615 C3.4@15150,10615 C2.3@15523.43,10615 C2.4@15925,10615 C1.3@16290,10615 C1.4@16691.57,10615 16691.57,11727.09 R1.1@17065,11727.09
  Bottom Layer w15.75: v1(14386.18,9845) 14753.43,9845 C2.3@15523.43,10615
NetC3_1: C3.1 C3.2 R3.2 | length 872.9
  Top Layer w157.48: R3.2@14280,12675 14286.93,12681.93 C3.2@14748.43,12681.93 C3.1@15150,12681.93
NetC4_3: C4.3 C4.4 C5.3 C5.4 C6.3 C6.4 FB16.1 L5.2 R4.1 | length 9821.4
  Top Layer w15.75: FB16.1@14930,9840 v1(14935,9845)
  Top Layer w157.48: L5.2@13485,14540 14515,14540 14763.43,14291.57 C6.3@14763.43,13533.07 C6.4@15165,13533.07 C5.3@15538.43,13533.07 C5.4@15940,13533.07 C4.3@16305,13533.07 C4.4@16706.57,13533.07 16706.57,14626.57 16710,14630 17060,14630
  Bottom Layer w15.75: v1(14935,9845) 15240,9845 15775,10380 15775,13368.07 C5.4@15940,13533.07
NetC6_1: C6.1 C6.2 R6.2 | length 917.1
  Top Layer w157.48: R6.2@14250,15595 14255,15600 C6.2@14763.43,15600 C6.1@15165,15600
NetC7_3: C7.3 C7.4 C8.3 C8.4 C9.3 C9.4 FB17.1 L5.3 R7.1 | length 14033.3
  Top Layer w15.75: FB17.1@15475,9837.48 v1(15475,9840)
  Top Layer w157.48: L5.3@13485,15327.4 13485,16635 ; 13495,16670 13945,17120 14360,17120 14763.43,16716.57 C9.3@14763.43,16393.07 C9.4@15165,16393.07 C8.3@15538.43,16393.07 C8.4@15940,16393.07 C7.3@16305,16393.07 C7.4@16706.57,16393.07 16706.57,17490 R7.1@17095,17490
  Bottom Layer w15.75: v1(15475,9840) 15770,9840 16460,10530 16460,15873.07 C8.4@15940,16393.07
NetC9_1: C9.1 C9.2 R9.2 | length 912.1
  Top Layer w157.48: R9.2@14255,18465 14260,18460 C9.2@14763.43,18460 C9.1@15165,18460
NetC14_1: C14.1 D1.C R10.1 R11.2 U1.2 | length 735.8
  Top Layer w7.87: U1.2@17612,8051.09 17612,8306.98 ; v1(17618.48,8329.96) 17618.48,8410.44 17642,8433.96 R11.2@17642,8449.96
  Bottom Layer w7.87: v1(17618.48,8329.96) 17730.04,8329.96 17775,8285 v1(17775,8110)
NetC14_2: C14.2 D2.C R14.2 U1.3 | length 424.9
  Top Layer w7.87: R14.2@17514,8459.6 R14.2@17514,8449.96 17550.25,8413.71 17550.25,8333.23 C14.2@17553.52,8329.96 ; U1.3@17562,8051.09 C14.2@17562,8329.96
NetC21_2: C21.2 FB3.1 U2.3 | length 367.9
  Top Layer w10: U2.3@17908.43,8807.4 17971.02,8870 FB3.1@18055.28,8870 18055.28,8692.48 C21.2@18067.76,8680
NetC30_1: C30.1 C33.2 FB4.1 R16.2 U4.1 | length 462.3
  Top Layer w10: FB4.1@18515.28,8940 18515.28,8902.48 C33.2@18572.76,8845 18575.24,8842.52 R16.2@18575.24,8750 18575.28,8749.96 C30.1@18575.28,8660 18520.28,8605 U4.1@18520.28,8525.35
NetC30_2: C30.2 R16.1 R18.2 U4.2 | length 318.7
  Top Layer w10: R18.2@18422.76,8750 R16.1@18510.28,8750 R16.1@18510.28,8750 C30.2@18510.31,8660 18494.69,8644.37 U4.2@18494.69,8525.35
NetC34_2: C34.2 U4.6 | length 196
  Top Layer w10: v1(18466.38,8285) 18466.38,8357.28 U4.6@18469.09,8360
  Bottom Layer w10: v1(18375.28,8350) 18442.48,8282.8 18444.69,8285 v1(18466.38,8285)
NetC39_1: C39.1 D9.C R19.1 R20.2 U5.2 | length 744.6
  Top Layer w7.87: U5.2@16112,8051.09 16112,8306.98 ; v1(16118.48,8329.96) 16118.48,8410.44 16142,8433.96 R20.2@16142,8449.96
  Bottom Layer w7.87: v1(16118.48,8329.96) 16250.04,8329.96 16280,8300 v1(16280,8115)
NetC39_2: C39.2 D10.C R23.2 U5.3 | length 424.9
  Top Layer w7.87: R23.2@16014,8459.6 R23.2@16014,8449.96 16050.25,8413.71 16050.25,8333.23 C39.2@16053.52,8329.96 ; U5.3@16062,8051.09 C39.2@16062,8329.96
NetC46_2: C46.2 FB7.1 U6.3 | length 367.9
  Top Layer w10: U6.3@16408.43,8807.4 16471.02,8870 FB7.1@16555.28,8870 16555.28,8692.48 C46.2@16567.76,8680
NetC55_1: C55.1 C58.2 FB8.1 R25.2 U8.1 | length 462.3
  Top Layer w10: FB8.1@17015.28,8940 17015.28,8902.48 C58.2@17072.76,8845 17075.24,8842.52 R25.2@17075.24,8750 17075.28,8749.96 C55.1@17075.28,8660 17020.28,8605 U8.1@17020.28,8525.35
NetC55_2: C55.2 R25.1 R27.2 U8.2 | length 318.7
  Top Layer w10: R27.2@16922.76,8750 R25.1@17010.28,8750 R25.1@17010.28,8750 C55.2@17010.31,8660 16994.69,8644.37 U8.2@16994.69,8525.35
NetC59_2: C59.2 U8.6 | length 196
  Top Layer w10: v1(16966.38,8285) 16966.38,8357.28 U8.6@16969.09,8360
  Bottom Layer w10: v1(16875.28,8350) 16942.48,8282.8 16944.69,8285 v1(16966.38,8285)
NetC64_1: C64.1 D17.C R28.1 R29.2 U9.2 | length 757.8
  Top Layer w7.87: U9.2@19111.72,8076.09 19111.72,8331.98 ; v1(19118.2,8354.96) 19118.2,8435.44 19141.72,8458.96 R29.2@19141.72,8474.96 ; v1(19275,8137.48) R28.1@19275,8150
  Bottom Layer w7.87: v1(19118.2,8354.96) 19249.96,8354.96 19250,8355 19275,8330 v1(19275,8137.48)
NetC64_2: C64.2 D18.C R32.2 U9.3 | length 424.9
  Top Layer w7.87: R32.2@19013.72,8484.6 R32.2@19013.72,8474.96 19049.98,8438.71 19049.98,8358.23 C64.2@19053.24,8354.96 ; U9.3@19061.72,8076.09 C64.2@19061.72,8354.96
NetC71_2: C71.2 FB11.1 U10.3 | length 367.9
  Top Layer w10: U10.3@19408.15,8832.4 19470.75,8895 FB11.1@19555,8895 19555,8717.48 C71.2@19567.48,8705
NetC80_1: C80.1 C83.2 FB12.1 R34.2 U12.1 | length 462.3
  Top Layer w10: FB12.1@20015,8965 20015,8927.48 C83.2@20072.48,8870 20074.96,8867.52 R34.2@20074.96,8775 R34.2@20074.96,8775 C80.1@20075,8685 20020,8630 U12.1@20020,8550.35
NetC80_2: C80.2 R34.1 R36.2 U12.2 | length 318.7
  Top Layer w10: R36.2@19922.48,8775 R34.1@20010,8775 R34.1@20010,8775 C80.2@20010.04,8685 19994.41,8669.37 U12.2@19994.41,8550.35
NetC84_2: C84.2 U12.6 | length 196
  Top Layer w10: v1(19966.1,8310) 19966.1,8382.28 U12.6@19968.82,8385
  Bottom Layer w10: v1(19875,8375) 19942.2,8307.8 19944.41,8310 v1(19966.1,8310)
NetC91_2: C91.2 FB13.1 U13.3 | length 367.9
  Top Layer w10: U13.3@13128.15,8807.13 13190.75,8869.72 FB13.1@13275,8869.72 13275,8692.2 C91.2@13287.48,8679.72
NetC100_1: C100.1 C103.2 FB14.1 R38.2 U15.1 | length 462.3
  Top Layer w10: FB14.1@13735,8939.72 13735,8902.2 C103.2@13792.48,8844.72 13794.96,8842.24 R38.2@13794.96,8749.72 R38.2@13794.96,8749.72 C100.1@13795,8659.72 13740,8604.72 U15.1@13740,8525.08
NetC100_2: C100.2 R38.1 R40.2 U15.2 | length 318.7
  Top Layer w10: R40.2@13642.48,8749.72 R38.1@13730,8749.72 R38.1@13730,8749.72 C100.2@13730.04,8659.72 13714.41,8644.09 U15.2@13714.41,8525.08
NetC104_2: C104.2 U15.6 | length 196
  Top Layer w10: v1(13686.1,8284.72) 13686.1,8357.01 U15.6@13688.82,8359.72
  Bottom Layer w10: v1(13595,8349.72) 13662.2,8282.52 13664.41,8284.72 v1(13686.1,8284.72)
NetC109_1: C109.1 D31.C R41.1 R44.2 U16.2 | length 844.9
  Top Layer w10: U16.2@14456.18,8050 14456.18,8367.52 C109.1@14458.66,8370 ; R44.2@14491.18,8475 14491.18,8402.52 C109.1@14458.66,8370 ; v1(14565,8370) 14468.66,8370 14463.66,8365 C109.1@14458.66,8370 ; R41.1@14625,8099.96 v1(14625,8210)
  Bottom Layer w10: v1(14565,8370) 14625,8310 v1(14625,8210)
NetC114_1: C114.1 D33.C R53.1 R56.2 U17.2 | length 844.4
  Top Layer w10: U17.2@14994.96,8044.96 14994.96,8362.48 C114.1@14997.44,8364.96 ; R56.2@15029.96,8469.96 15029.96,8397.48 C114.1@14997.44,8364.96 ; v1(15115,8365) v1(15115,8365) C114.1@14997.44,8364.96 ; R53.1@15170,8107.48 v1(15170,8210)
  Bottom Layer w10: v1(15115,8365) 15110,8365 15170,8305 v1(15170,8210)
NetC119_1: C119.1 D35.C R65.1 R68.2 U18.2 | length 829.6
  Top Layer w10: U18.2@15545,8049.13 D35.C@15545,8227.48 15545,8360 C119.1@15547.48,8362.48 ; R68.2@15580,8467.48 15580,8395 C119.1@15547.48,8362.48 ; R65.1@15715,8102.48 15715,8310 15665,8360 15549.96,8360 C119.1@15547.48,8362.48
NetC124_1: C124.1 D37.C R77.1 R78.2 U19.2 | length 718.5
  Top Layer w7.87: U19.2@8656.72,8051.09 8656.72,8306.98 ; v1(8663.2,8329.96) 8663.2,8410.44 8686.72,8433.96 R78.2@8686.72,8449.96
  Bottom Layer w7.87: v1(8663.2,8329.96) 8750.04,8329.96 8825,8255 v1(8825,8115)
NetC124_2: C124.2 D38.C R81.2 U19.3 | length 424.9
  Top Layer w7.87: R81.2@8558.72,8459.6 R81.2@8558.72,8449.96 8594.98,8413.71 8594.98,8333.23 C124.2@8598.24,8329.96 ; U19.3@8606.72,8051.09 C124.2@8606.72,8329.96
NetC131_2: C131.2 FB20.1 U20.3 | length 367.9
  Top Layer w10: U20.3@8953.15,8807.4 9015.75,8870 FB20.1@9100,8870 9100,8692.48 C131.2@9112.48,8680
NetC140_1: C140.1 C143.2 FB21.1 R83.2 U22.1 | length 462.3
  Top Layer w10: FB21.1@9560,8940 9560,8902.48 C143.2@9617.48,8845 9619.96,8842.52 R83.2@9619.96,8750 R83.2@9619.96,8750 C140.1@9620,8660 9565,8605 U22.1@9565,8525.35
NetC140_2: C140.2 R83.1 R85.2 U22.2 | length 318.7
  Top Layer w10: R85.2@9467.48,8750 R83.1@9555,8750 R83.1@9555,8750 C140.2@9555.04,8660 9539.41,8644.37 U22.2@9539.41,8525.35
NetC144_2: C144.2 U22.6 | length 196
  Top Layer w10: v1(9511.1,8285) 9511.1,8357.28 U22.6@9513.82,8360
  Bottom Layer w10: v1(9420,8350) 9487.2,8282.8 9489.41,8285 v1(9511.1,8285)
NetC149_1: C149.1 D45.C R86.1 R87.2 U23.2 | length 737.8
  Top Layer w7.87: U23.2@10161.72,8051.09 10161.72,8306.98 ; v1(10168.2,8329.96) 10168.2,8410.44 10191.72,8433.96 R87.2@10191.72,8449.96
  Bottom Layer w7.87: v1(10168.2,8329.96) 10295.04,8329.96 10320,8305 v1(10320,8115)
NetC149_2: C149.2 D46.C R90.2 U23.3 | length 424.9
  Top Layer w7.87: R90.2@10063.72,8459.6 R90.2@10063.72,8449.96 10099.98,8413.71 10099.98,8333.23 C149.2@10103.24,8329.96 ; U23.3@10111.72,8051.09 C149.2@10111.72,8329.96
NetC156_2: C156.2 FB24.1 U24.3 | length 367.9
  Top Layer w10: U24.3@10458.15,8807.4 10520.75,8870 FB24.1@10605,8870 10605,8692.48 C156.2@10617.48,8680
NetC165_1: C165.1 C168.2 FB25.1 R92.2 U26.1 | length 462.3
  Top Layer w10: FB25.1@11065,8940 11065,8902.48 C168.2@11122.48,8845 11124.96,8842.52 R92.2@11124.96,8750 R92.2@11124.96,8750 C165.1@11125,8660 11070,8605 U26.1@11070,8525.35
NetC165_2: C165.2 R92.1 R94.2 U26.2 | length 318.7
  Top Layer w10: R94.2@10972.48,8750 R92.1@11060,8750 R92.1@11060,8750 C165.2@11060.04,8660 11044.41,8644.37 U26.2@11044.41,8525.35
NetC169_2: C169.2 U26.6 | length 196
  Top Layer w10: v1(11016.1,8285) 11016.1,8357.28 U26.6@11018.82,8360
  Bottom Layer w10: v1(10925,8350) 10992.2,8282.8 10994.41,8285 v1(11016.1,8285)
NetC174_1: C174.1 D53.C R95.1 R96.2 U27.2 | length 727
  Top Layer w7.87: U27.2@11627,8051.09 11627,8306.98 ; v1(11633.48,8329.96) 11633.48,8410.44 11657,8433.96 R96.2@11657,8449.96 ; v1(11790,8120) R95.1@11795,8115
  Bottom Layer w7.87: v1(11633.48,8329.96) 11735.04,8329.96 11790,8275 v1(11790,8120)
NetC174_2: C174.2 D54.C R99.2 U27.3 | length 424.9
  Top Layer w7.87: R99.2@11529,8459.6 R99.2@11529,8449.96 11565.25,8413.71 11565.25,8333.23 C174.2@11568.52,8329.96 ; U27.3@11577,8051.09 C174.2@11577,8329.96
NetC181_2: C181.2 FB28.1 U28.3 | length 367.9
  Top Layer w10: U28.3@11923.43,8807.4 11986.02,8870 FB28.1@12070.28,8870 12070.28,8692.48 C181.2@12082.76,8680
NetC190_1: C190.1 C193.2 FB29.1 R101.2 U30.1 | length 462.3
  Top Layer w10: FB29.1@12530.28,8940 12530.28,8902.48 C193.2@12587.76,8845 12590.24,8842.52 R101.2@12590.24,8750 12590.28,8749.96 C190.1@12590.28,8660 12535.28,8605 U30.1@12535.28,8525.35
NetC190_2: C190.2 R101.1 R103.2 U30.2 | length 318.7
  Top Layer w10: R103.2@12437.76,8750 R101.1@12525.28,8750 R101.1@12525.28,8750 C190.2@12525.32,8660 12509.69,8644.37 U30.2@12509.69,8525.35
NetC194_2: C194.2 U30.6 | length 196
  Top Layer w10: v1(12481.38,8285) 12481.38,8357.28 U30.6@12484.09,8360
  Bottom Layer w10: v1(12390.28,8350) 12457.48,8282.8 12459.69,8285 v1(12481.38,8285)
NetC195_1: C195.1 C198.2 C199.2 L8.2 PS1.2 | length 913.4
  Top Layer w15.75: PS1.2@8805,6165 8815,6175 L8.2@9203.15,6175
  Bottom Layer w15.75: C195.1@8660,6385 8685,6360 C199.2@8685,6160 8685,6147.48 8702.52,6165 PS1.2@8805,6165 8937.64,6165 C198.2@8940,6167.36
NetC210_1: C210.1 J1.12 R104.1 R112.1 U33.5 | length 1854.2
  Top Layer w7.87: v1(14140,5945) 14145,5945 R112.1@14740,6540 14845,6645 C210.1@14895,6645 14900.04,6645 14900.04,6740 14802.52,6740 U33.5@14797.52,6745
  Bottom Layer w7.87: J1.12@13587.17,5970 13662.17,5895 14090,5895 v1(14140,5945)
NetC210_2: C210.2 R104.2 R108.1 U33.8 | length 477.4
  Top Layer w7.87: R108.1@14740,6975 14797.52,6917.48 U33.8@14797.52,6895 14890,6895 14962.48,6822.52 R104.2@14962.48,6725 14962.48,6647.52 C210.2@14959.96,6645
NetC211_1: C211.1 J1.6 R105.1 R113.1 U34.5 | length 5153.2
  Top Layer w7.87: v1(16660,5865) R113.1@17335,6540 17440,6645 C211.1@17490,6645 17495.04,6645 17495.04,6740 17397.52,6740 U34.5@17392.52,6745
  Bottom Layer w7.87: J1.6@12932.83,5970 13067.83,5835 16630,5835 v1(16660,5865)
NetC211_2: C211.2 R105.2 R109.1 U34.8 | length 477.4
  Top Layer w7.87: R109.1@17335,6975 17392.52,6917.48 U34.8@17392.52,6895 17485,6895 17557.48,6822.52 R105.2@17557.48,6725 17557.48,6647.52 C211.2@17554.96,6645
NetC222_1: C222.1 J1.11 R112.2 R117.1 U33.4 | length 1885.9
  Top Layer w7.87: J1.11@13478.11,5970 13553.11,5895 14030.04,5895 R112.2@14675.04,6540 14570.04,6645 C222.1@14515,6645 14515,6727.52 R117.1@14517.48,6730 14532.48,6745 U33.4@14612.48,6745
NetC222_2: C222.2 R114.1 R117.2 U33.1 | length 903.2
  Top Layer w7.87: C222.2@14450.04,6645 14452.52,6647.48 R117.2@14452.52,6730 14295,6730 14250,6775 14250,6855 14335,6940 14567.48,6940 U33.1@14612.48,6895 14660,6942.52 R114.1@14660,6975
NetC223_1: C223.1 J1.5 R113.2 R119.1 U34.4 | length 5185
  Top Layer w7.87: J1.5@12823.78,5970 12958.78,5835 16565.04,5835 R113.2@17270.04,6540 17165.04,6645 C223.1@17110,6645 17110,6727.52 R119.1@17112.48,6730 17127.48,6745 U34.4@17207.48,6745